# Altium PCB CORE_Prototype_1.PcbDoc
Units mil, origin at the board's own origin, x right, y up, seen from the top; angles counter-clockwise.
Board outline 1405.03 x 1162.59 mil, 2 copper layers (Top Layer, Bottom Layer); 42 components, 43 nets, 240 pads, 109 vias.
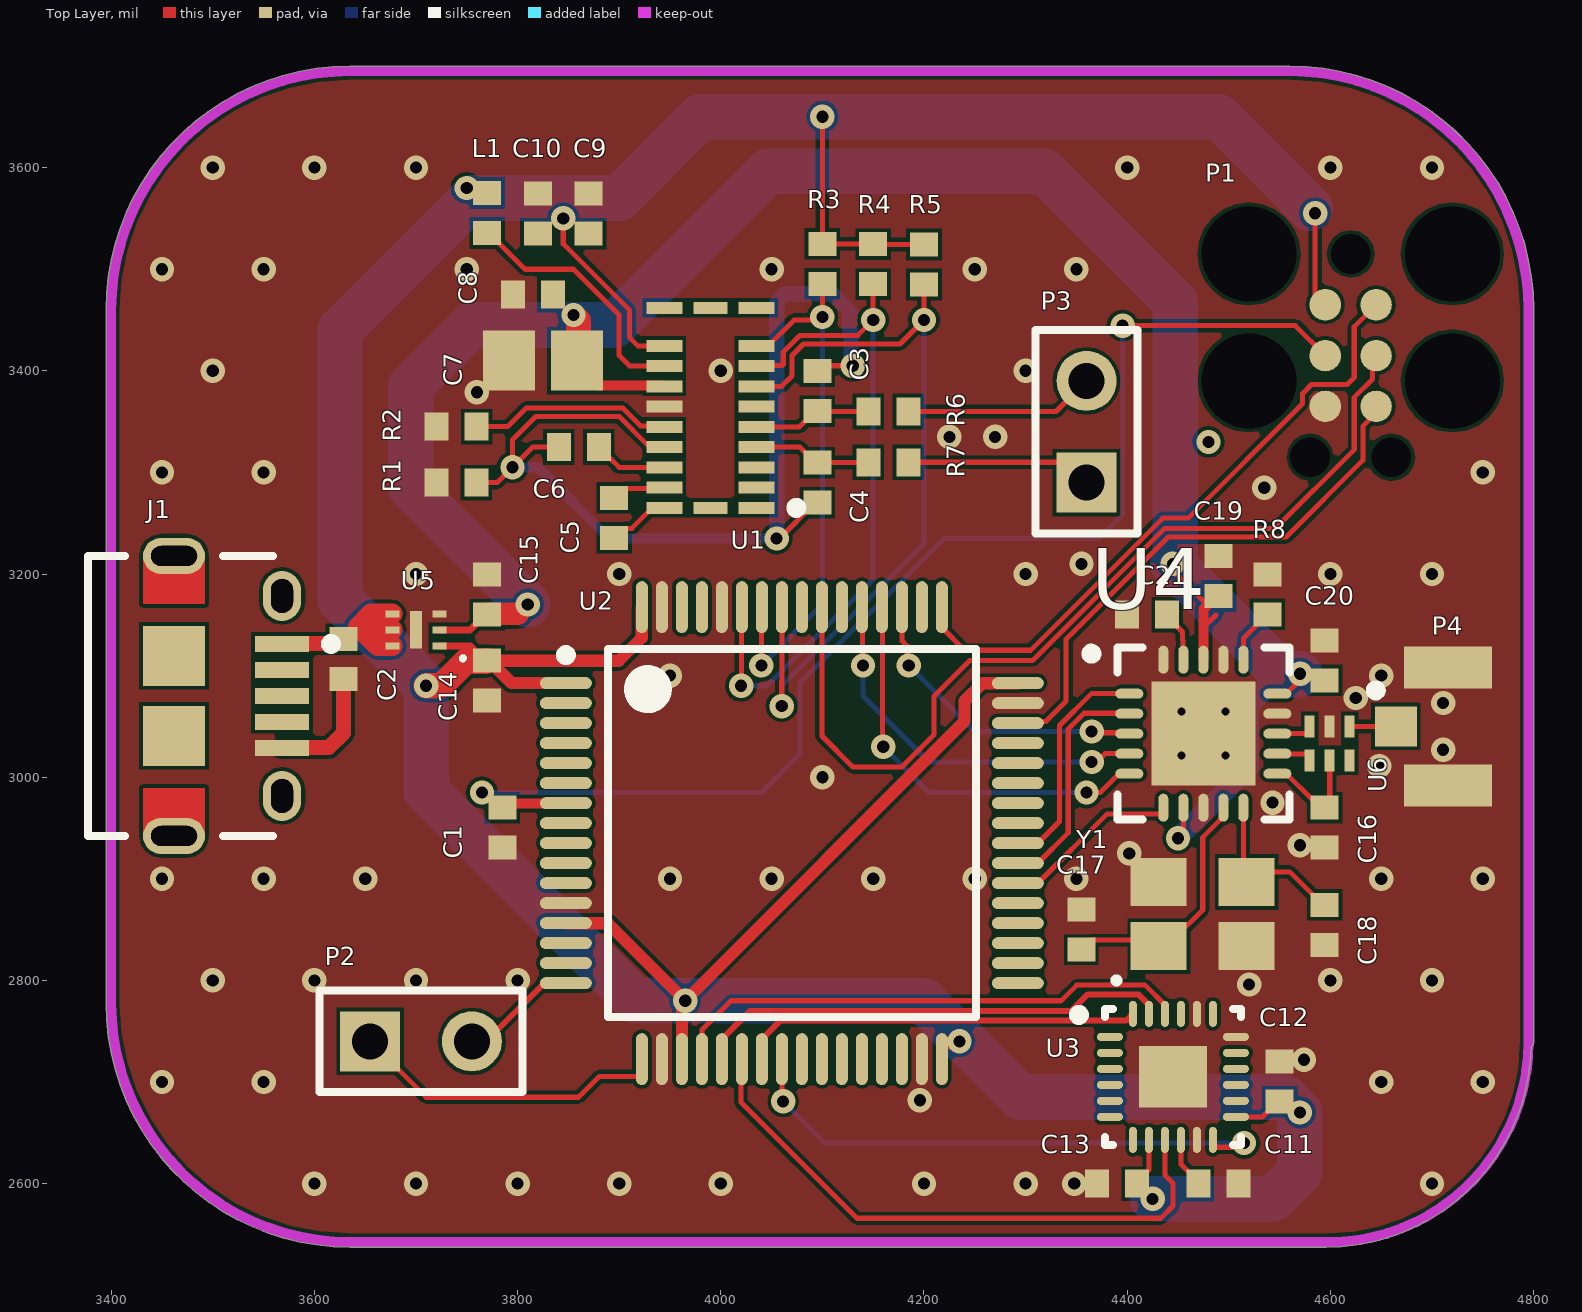
[diagram p0: Top Layer view]
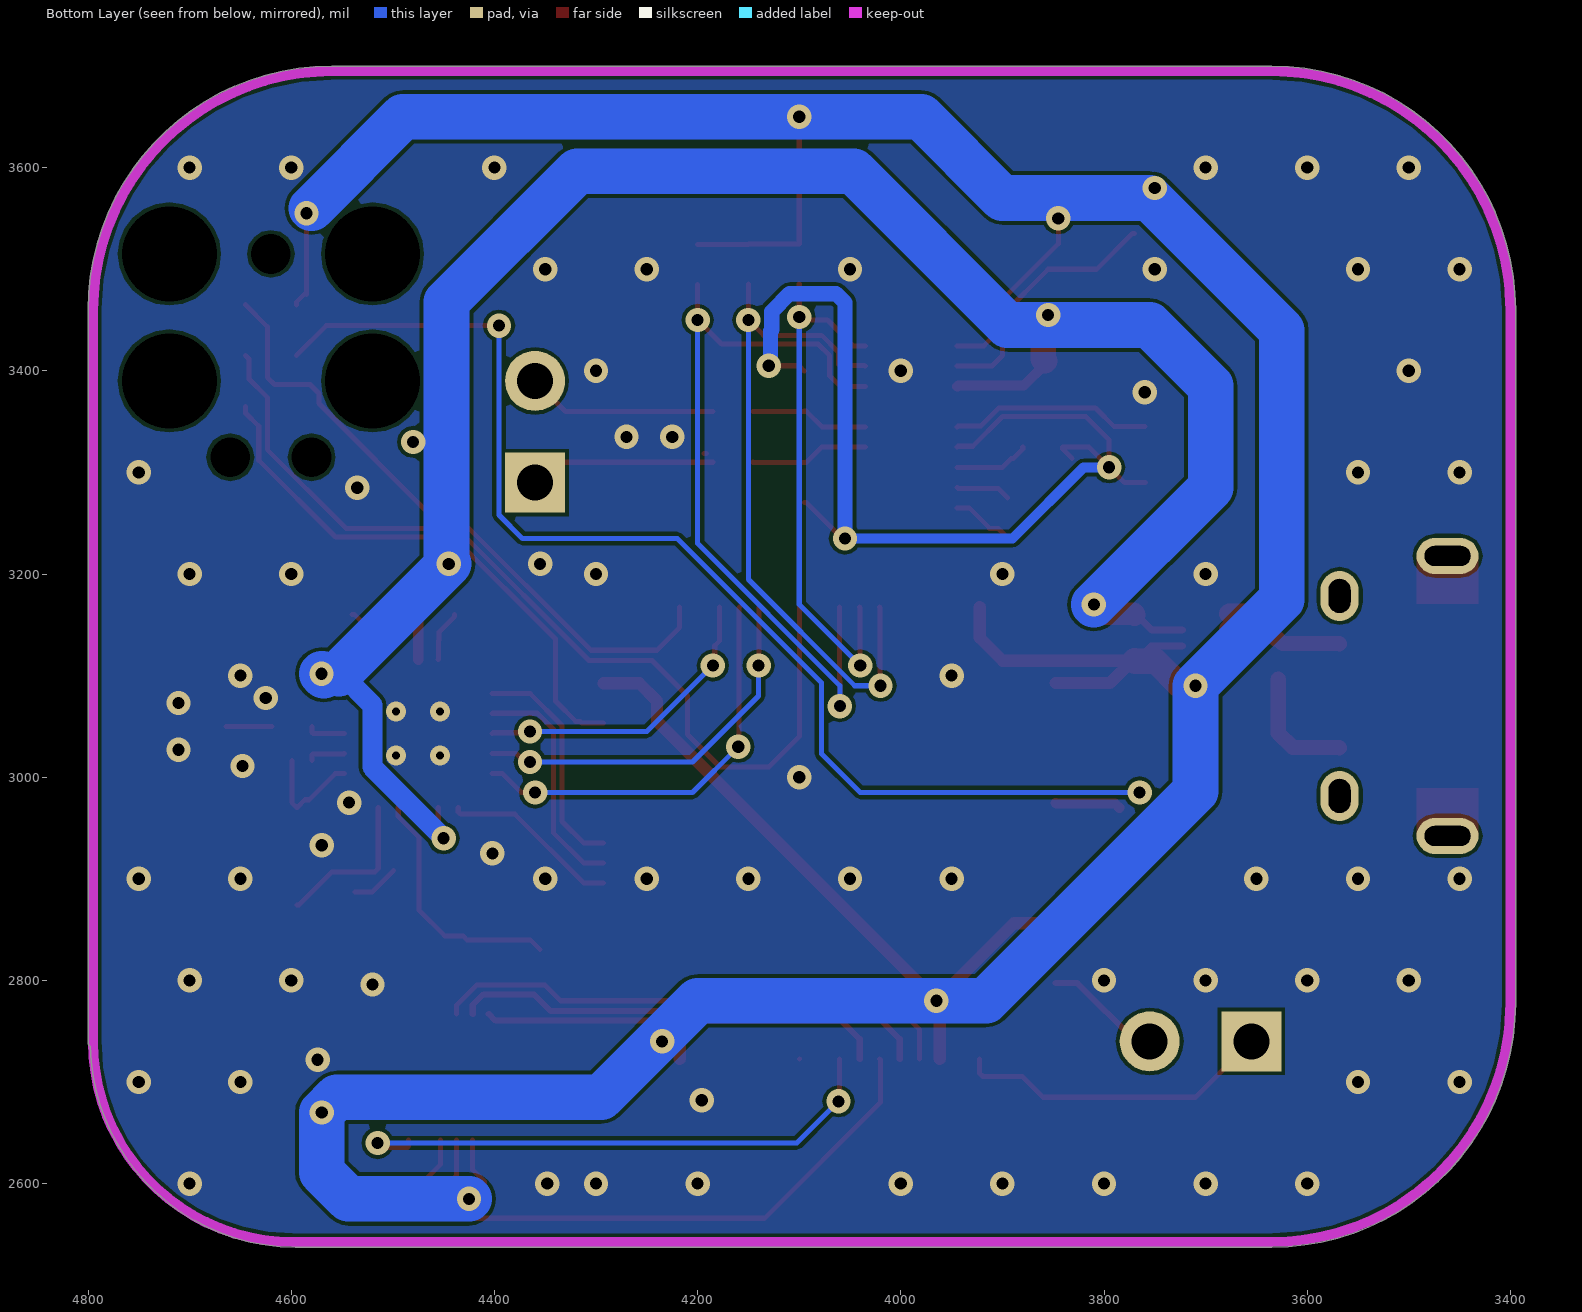
[diagram p1: Bottom Layer view, seen from below]
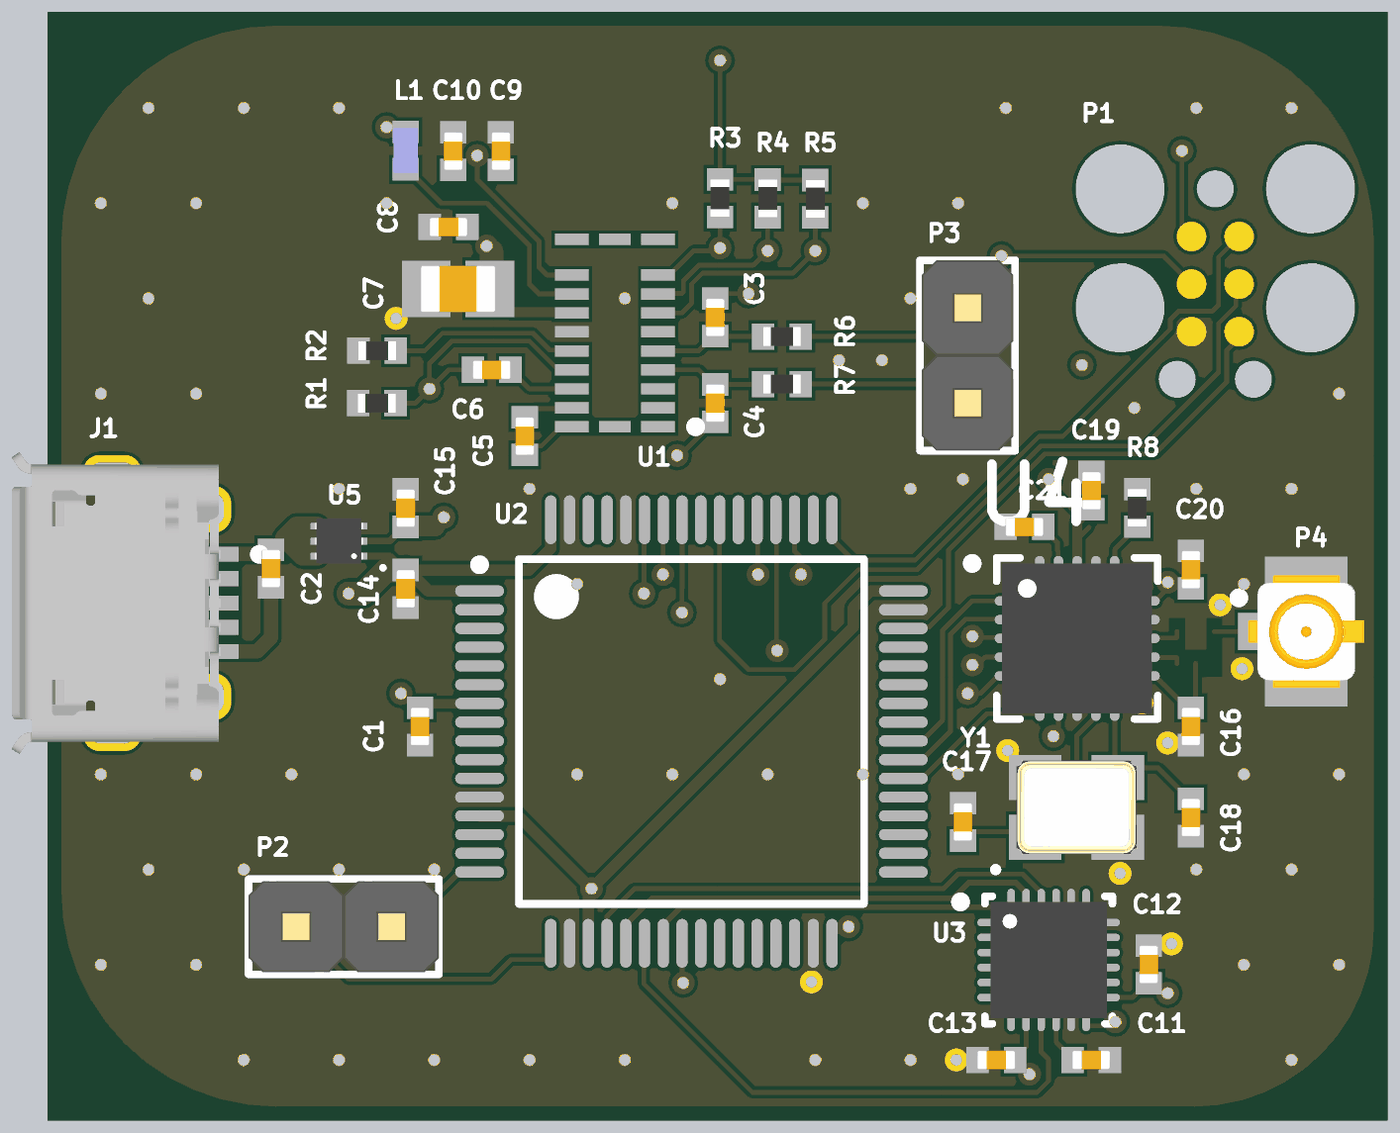
[diagram p2: 3D render of the assembled board from above, using the file's embedded part models]

## Layer stack, top to bottom
Top Solder: solder mask 0.4, Solder Resist, Dk 3.5
Top Layer: signal copper 1.4
Dielectric 1: dielectric 12.6, FR-4, Dk 4.8
Bottom Layer: signal copper 1.4
Bottom Solder: solder mask 0.4, Solder Resist, Dk 3.5

## Board outline
3394.99,2777.5 ccw(c3635.05,2777.5) 3635,2537.43 ccw(c3635,2542.45) 3635,2537.43 4596.01,2537.43 ccw(c4596.01,2739.17) 4797.71,2734.95 ccw(c4795,2739.17) 4798.55,2735.63 ccw(c4795,2739.18) 4800.02,2739.18 4800.02,3459.95 ccw(c4559.95,3459.95) 4560,3700.01 ccw(c4560,3695) 4560,3700.01 3635.25,3700.01 ccw(c3635.05,3695) 3635.05,3700.02 ccw(c3635.05,3459.95) 3394.99,3460 ccw(c3400,3460) 3394.99,3460

## Design rules (kind name [scope] priority, off if disabled: settings)
Clearance [All] p1: gap=3.5 ignorepadtopadclearanceinfootprint=FALSE
PolygonConnect [All] p1: connectstyle=Direct reliefconductorwidth=10 reliefentries=4 polygonreliefangle="90 Angle" airgapwidth=10
RoutingVias [All] p1: holewidth=12 width=24 viastyle="Through Hole" minholewidth=12 minwidth=24 maxholewidth=28 maxwidth=50
SolderMaskExpansion [All] p1: expansion=0
Width [All] p1: maxlimit=250 minlimit=5 preferedwidth=5
30 further rules are at their usual default settings.

## Classes and differential pairs
component class U_RADIO_nRF24L01: C16 C17 C18 C19 C20 C21 P4 R8 U4 U6 Y1
component class U_MAIN_STM32L476RGT6: C1 C2 C14 C15 J1 P1 P2 U2 U5
component class U_HEALTH_MAX86150: C3 C4 C5 C6 C7 C8 C9 C10 L1 P3 R1 R2 R3 R4 R5 R6 R7 U1
component class U_ACC_ICM20948: C11 C12 C13 U3

## Components (designator, comment, footprint, x,y, rotation, side; value= is the part's Value field where it differs from the comment)
C1 "Cap" CAPC1005N 3785,2950.31 r90 top value=0.1uF
C2 "Cap" CAPC1005N 3628.63,3116.15 r90 top value=1uF
C3 "Cap" CAPC1005N 4095,3380 r270 top value=10pF
C4 "Cap" CAPC1005N 4095,3290 r270 top value=10pF
C5 "Cap" CAPC1005N 3895,3255.32 r270 top value=1uF
C6 "Cap" CAPC1005N 3860.31,3325 r0 top value=1uF
C7 "Cap" CAPC2012N 3825,3410 r0 top value=10uF
C8 "Cap" CAPC1005N 3815,3475 r0 top value=0.1uF
C9 "Cap" CAPC1005N 3870,3554.69 r270 top value=2.2uF
C10 "Cap" CAPC1005N 3820,3554.69 r270 top value=0.1uF
C11 "Cap" CAPC1005N 4489.69,2600 r180 top value=0.1uF
C12 "Cap" CAPC1005N 4550,2700.32 r270 top value=0.1uF
C13 "Cap" CAPC1005N 4390,2600 r0 top value=0.1uF
C14 "Cap" CAPC1005N 3770,3095 r90 top value=1uF
C15 "Cap" CAPC1005N 3770,3179.69 r270 top value=1uF
C16 "Cap" CAPC1005N 4594.37,2950.31 r90 top value=2.2nF
C17 "Cap" CAPC1005N 4355,2850 r270 top value=15pF
C18 "Cap" CAPC1005N 4594.37,2854.68 r90 top value=15pF
C19 "Cap" CAPC1005N 4490,3198 r270 top value=10nF
C20 "Cap" CAPC1005N 4594.37,3115 r270 top value=1nF
C21 "Cap" CAPC1005N 4419.68,3160 r0 top value=33nF
J1 "10118194-0001LF" FCI-10118194-0001LF-5_V 3515,3080 r270 top
L1 "Ferrite Bead" INDC1005N 3770,3555.31 r90 top value=0H
P1 "DNI" TC2030 4620,3515 r270 top
P2 "Header 2" HDR1X2-PINS 3655,2740 r0 top
P3 "Header 2" HDR1X2-PINS 4360,3290 r90 top
P4 "BNC" MCB3-V4 4715.55,3050 r270 top
R1 "Res3" RESC1005N 3739.68,3290 r0 top value=0
R2 "Res3" RESC1005N 3740,3345 r0 top value=0
R3 "Res3" RESC1005N 4100,3505.32 r90 top value=50K
R4 "Res3" RESC1005N 4150,3505 r90 top value=50K
R5 "Res3" RESC1005N 4200,3504.68 r90 top value=50K
R6 "Res3" RESC1005N 4165,3360 r180 top value=50K
R7 "Res3" RESC1005N 4165,3310 r180 top value=50K
R8 "Res" RESC1005N 4538.03,3180 r270 top value=22k
U1 "MAX86150EFF+" MAXM-OESIP-22_V 3989.72,3363.56 r180 top
U2 "STM32L476RGT6" STM-LQFP64_N 4070,2945 r0 top
U3 "ICM-20948" TDK-QFN-24_L 4445,2705 r0 top
U4 "NRF24L01P-T" NRSC-QFN-20_L 4475,3042.83 r0 top
U5 "MIC5393-SGYMX-TR" MIC5392 3700,3145 r180 top
U6 "2450BM14A0002T" 2450BM14A0002 5308.03,3158.27 r0 top
Y1 "XTAL_4SMD" XTAL3225-4-N 4474.37,2865 r0 top

## Footprints (in the part's own frame and the unit in brackets; to place one, negate y for a bottom-side part, rotate by r counter-clockwise, add the part's x,y. Pads: shape width x height; smd on the part's side, far side on the other; paste and mask are expansions set on the pad)
2450BM14A0002 [mm]
  rect 0.25x0.55 smd: 1(-17.5,-2.75) 2(-18,-2.75) 3(-18.5,-2.75) 4(-18.5,-3.6) 5(-18,-3.6) 6(-17.5,-3.6)
CAPC1005N [mm] "Chip Capacitor (0402), Body 1.0x0.5mm, IPC Medium Density"
  rect 0.6x0.7 smd: 1(-0.5,0) 2(0.5,0)
  body extent -0.51,-0.26 0.51,0.26, height 0.61
CAPC2012N [mm] "Chip Capacitor (0805), Body 2.0x1.3mm, IPC Medium Density"
  rect 1.3x1.5 smd: 1(-0.85,0) 2(0.85,0)
  body extent -1,-0.63 1,0.63, height 0.85
FCI-10118194-0001LF-5_V [mm] "SMD, 5-Leads, Body 7x5mm, Pitch 0.65 mm"
  rect 0.4x1.35 smd: 1(-1.3,1.35) 2(-0.65,1.35) 3(0,1.35) 4(0.65,1.35) 5(1.3,1.35)
  oval 1.25x0.95 hole 0.55 slot 0.85 at 0 deg: 6(-2.5,1.35) 7(2.5,1.35)
  oval 0.9x1.55 hole 0.5 slot 1.15 at 90 deg: 8(-3.5,-1.35) 9(3.5,-1.35)
  rect 1.5x1.55 smd: 10(-1,-1.35) 11(1,-1.35)
  Top Layer region: -2.3,-2.125 -2.3,-0.575 -3.5,-0.575 -3.5,-2.125
  Top Layer region: 3.5,-2.125 3.5,-0.575 2.3,-0.575 2.3,-2.125
  silkscreen extent -3.5,-3.5 3.5,2.7, body extent -4.02,-4.03 4.02,1.55, height 2.72
HDR1X2-PINS [mm] "Connector; Header; 2 Position"
  rect 1.5x1.5 hole 0.9: 1(0,0)
  round 1.5 hole 0.9: 2(2.54,0)
  silkscreen extent -1.27,-1.27 3.81,1.27, body extent -1.27,-1.22 3.81,1.22, height 10.3
INDC1005N [mm] "Chip Inductor, Body 1.0x0.5mm, IPC Medium Density"
  rect 0.6x0.7 smd: 1(-0.5,0) 2(0.5,0)
  body extent -0.59,-0.32 0.59,0.32, height 0.65
MAXM-OESIP-22_V [mm] "SMD, 22-Leads, Body 3.3x5.6mm"
  rect 0.9x0.3 smd: 1(-1.15,2.5) 2(-1.15,1.994) 3(-1.15,1.488) 4(-1.15,0.981) 5(-1.15,0.475) 6(-1.15,-0.031) 7(-1.15,-0.537) 8(-1.15,-1.044) 9(-1.15,-1.55) 10(-1.15,-2.5) 12(1.15,-2.5) 13(1.15,-1.55) 14(1.15,-1.044) 15(1.15,-0.537) 16(1.15,-0.031) 17(1.15,0.475) 18(1.15,0.981) 19(1.15,1.488) 20(1.15,1.994) 21(1.15,2.5)
  rect 0.85x0.3 smd: 11(0,-2.5) 22(0,2.5)
  silkscreen extent -2.28,2.38 -2.03,2.62, body extent -1.65,-2.8 1.65,2.8, height 1.4
MCB3-V4 [mm] "Connector; RF Coaxial, MCB SM; 4 Position; Vertical, Body 3.1x3.0mm (LxW)"
  rect 1x1.05 smd: 1(0,-1.3)
  rect 1.05x2.2 smd: 2(-1.475,0) 2(1.475,0)
  silkscreen extent -1.02,-1.92 -0.78,-1.67, body extent -1.5,-1.55 1.5,1.55, height 1.25
MIC5392 [mm] "SON, 6-Leads, Body 1.20x1.20mm, Pitch 0.40mm, Thermal Pad 0.94x0.02mm, IPC Medium Density"
  rect 0.35x0.18 smd: 1(-0.585,0.4) 2(-0.585,0) 3(-0.585,-0.4) 4(0.585,-0.4) 5(0.585,0) 6(0.585,0.4)
  rect 0.3x0.94 smd: 7(0,0)
  silkscreen extent -1.22,0.66 -1.12,0.76, body extent -0.64,-0.6 0.64,0.6, height 0.55
NRSC-QFN-20_L [mm] "QFN, 20-Leads, Body 4x4mm, Pitch 0.5mm, Thermal Pad 2.6x2.6mm, IPC High Density"
  oval 0.7x0.25 smd: 1(-1.85,1) 2(-1.85,0.5) 3(-1.85,0) 4(-1.85,-0.5) 5(-1.85,-1) 11(1.85,-1) 12(1.85,-0.5) 13(1.85,0) 14(1.85,0.5) 15(1.85,1)
  oval 0.25x0.7 smd: 6(-1,-1.85) 7(-0.5,-1.85) 8(0,-1.85) 9(0.5,-1.85) 10(1,-1.85) 16(1,1.85) 17(0.5,1.85) 18(0,1.85) 19(-0.5,1.85) 20(-1,1.85)
  rect 2.6x2.6 smd: 21(0,0)
  silkscreen extent -2.92,-2.15 2.15,2.15, body extent -2,-2 2,2, height 0.95
RESC1005N [mm] "Chip Resistor, Body 1.1x0.5mm, IPC Medium Density"
  rect 0.6x0.7 smd: 1(-0.5,0) 2(0.5,0)
  body extent -0.5,-0.25 0.5,0.25, height 0.35
STM-LQFP64_N [mm] "QFP, 64-Leads, Body 10x10mm, Pitch 0.5mm, IPC Medium Density"
  oval 1.3x0.3 smd: 1(-5.65,3.75) 2(-5.65,3.25) 3(-5.65,2.75) 4(-5.65,2.25) 5(-5.65,1.75) 6(-5.65,1.25) 7(-5.65,0.75) 8(-5.65,0.25) 9(-5.65,-0.25) 10(-5.65,-0.75) 11(-5.65,-1.25) 12(-5.65,-1.75) 13(-5.65,-2.25) 14(-5.65,-2.75) 15(-5.65,-3.25) 16(-5.65,-3.75) 33(5.65,-3.75) 34(5.65,-3.25) 35(5.65,-2.75) 36(5.65,-2.25) 37(5.65,-1.75) 38(5.65,-1.25) 39(5.65,-0.75) 40(5.65,-0.25) 41(5.65,0.25) 42(5.65,0.75) 43(5.65,1.25) 44(5.65,1.75) 45(5.65,2.25) 46(5.65,2.75) 47(5.65,3.25) 48(5.65,3.75)
  oval 0.3x1.3 smd: 17(-3.75,-5.65) 18(-3.25,-5.65) 19(-2.75,-5.65) 20(-2.25,-5.65) 21(-1.75,-5.65) 22(-1.25,-5.65) 23(-0.75,-5.65) 24(-0.25,-5.65) 25(0.25,-5.65) 26(0.75,-5.65) 27(1.25,-5.65) 28(1.75,-5.65) 29(2.25,-5.65) 30(2.75,-5.65) 31(3.25,-5.65) 32(3.75,-5.65) 49(3.75,5.65) 50(3.25,5.65) 51(2.75,5.65) 52(2.25,5.65) 53(1.75,5.65) 54(1.25,5.65) 55(0.75,5.65) 56(0.25,5.65) 57(-0.25,5.65) 58(-0.75,5.65) 59(-1.25,5.65) 60(-1.75,5.65) 61(-2.25,5.65) 62(-2.75,5.65) 63(-3.25,5.65) 64(-3.75,5.65)
  silkscreen extent -5.77,-4.6 4.6,4.6, body extent -5,-5 5,5, height 1.6
TC2030 [mil]
  round 31 smd paste-100: 1(50,-25) 2(50,25) 3(100,-25) 4(100,25) 5(150,-25) 6(150,25)
  round 0 hole 93.5 unplated paste+0: MH(0,100) MH(0,-100) MH(125,100) MH(125,-100)
  round 0 hole 39 unplated paste+0: MH(0,0) MH(200,-40) MH(200,40)
TDK-QFN-24_L [mm] "QFN, 24-Leads, Body 3.10x3.10mm, Pitch 0.40mm, Thermal Pad 1.70x1.54mm, IPC High Density"
  oval 0.65x0.2 smd: 1(-1.575,1) 2(-1.575,0.6) 3(-1.575,0.2) 4(-1.575,-0.2) 5(-1.575,-0.6) 6(-1.575,-1) 13(1.575,-1) 14(1.575,-0.6) 15(1.575,-0.2) 16(1.575,0.2) 17(1.575,0.6) 18(1.575,1)
  oval 0.2x0.65 smd: 7(-1,-1.575) 8(-0.6,-1.575) 9(-0.2,-1.575) 10(0.2,-1.575) 11(0.6,-1.575) 12(1,-1.575) 19(1,1.575) 20(0.6,1.575) 21(0.2,1.575) 22(-0.2,1.575) 23(-0.6,1.575) 24(-1,1.575)
  rect 1.7x1.54 smd: 25(0,0)
  silkscreen extent -2.47,-1.7 1.7,1.7, body extent -1.55,-1.55 1.55,1.55, height 1.05
XTAL3225-4-N [mm]
  rect 1.4x1.2 smd: 1(-1.101,-0.791) 2(1.099,-0.791) 3(1.099,0.809) 4(-1.101,0.809)
  silkscreen extent -2.21,-1.7 -2.11,-1.6, body extent -1.61,-1.25 1.61,1.27, height 0.6

## Part data
C1 C2 C3 C4 C5 C6 C7 C8 C9 C10 C11 C12 C13 C14 C15 C16 C17 C18 C19 C20 C21: "Capacitor", LatestRevisionDate=17-Jul-2002, LatestRevisionNote="Re-released for DXP Platform.", PackageDescription="Radial Cap, Thru-Hole; 2 Leads; 0.3 in Pin Spacing", PackageReference=RAD-0.3, Published=8-Jun-2000, Publisher="Altium Limited"
J1: library part CMP-2000-05120-1, "Micro USB B Type Receptacle, 1.8 A, -55 to 85 degC, 5-Pin SMD, RoHS, Tape and Reel", Manufacturer="Amphenol FCI", Package Description="5-Pin Surface Mount Device, Body 8.05 x 5.53 mm, Pitch 0.65 mm", Package Reference=10118194-0001LF-5, Body Orientation=RightAngle, Datasheet URL=https://datasheet.ciiva.com/26945/getdatasheetpartid-418619-26945695.pdf, Datasheet Version="Rev. A, 10/2011", Gender=RCP, Manufacturer URL=http://www.fci.com/, Mounting=SurfaceMount, Number of Contacts=5, Packaging=CutTape, Pitch=0.65mm, Rad Hard=No, Termination Method=Solder, Type=MicroUSBTypeB
L1: library part Inductor, "Inductor", Code_IEC=1005, Code_JEITA=0402, LatestRevisionDate=29-May-2009, LatestRevisionNote="IPC-7351 Footprint Added.", PackageDescription="Chip Inductor", PackageReference=0402-A, Published=8-Jun-2000, Publisher="Altium Limited"
P1: library part TC2030-CTX
P2 P3: "Header, 2-Pin", LatestRevisionDate=17-Jul-2002, LatestRevisionNote="Re-released for DXP Platform.", Publisher="Altium Limited"
P4: "BNC Elbow Connector", LatestRevisionDate=17-Jul-2002, LatestRevisionNote="Re-released for DXP Platform.", Publisher="Altium Limited"
R1 R2 R3 R4 R5 R6 R7: "Resistor", LatestRevisionDate=29-May-2009, LatestRevisionNote="IPC-7351 Footprint Added.", PackageDescription="Chip Resistor", PackageReference=J1-0603, Published=8-Jun-2000, Publisher="Altium Limited"
R8: library part Res1, "Resistor", LatestRevisionDate=17-Jul-2002, LatestRevisionNote="Re-released for DXP Platform.", PackageDescription="Axial Device, Thru-Hole; 2 Leads; 0.3 in Pin Spacing", PackageReference=AXIAL-0.3, Published=8-Jun-2000, Publisher="Altium Limited"
U1: library part CMP-2000-07578-1, "Integrated Photoplethysmogram and Electrocardiogram Bio-Sensor Module for Mobile Health, 1.7 to 2 V, -40 to 85 degC, 22-Pin OESIP, RoHS", Manufacturer=Maxim, Package Description="22-Pin Surface Mount Device, Body 3.3 x 5.6 mm", Package Reference=OESIP-22, Datasheet URL=http://www.mouser.com/ds/2/256/Maxim-6-13-2017-MAX86150%20DS-1114324.pdf, Datasheet Version="Rev. 1, 11/2016", Manufacturer URL=http://www.maximintegrated.com/, Mounting Technology=SurfaceMount
U2: library part CMP-1655-00012-2, "Ultra-Low-Power ARM Cortex-M4 32-bit MCU+FPU, 1024 KB Flash, 128 KB Internal RAM, 51 I/Os, 64-Pin LQFP, -40 to 85 degC, Tray", I/Os (High Current)=51, Manufacturer=STMicroelectronics, Operating Frequency(F) (Processor speed) (MHz)=80, Package Description="64-Pin Low-profile Quad Flat Package, Body 10 x 10 mm, Pitch 0.5 mm", Package Reference=LQFP64, Supply Voltage(Vcc) min (V)=1.71, ComponentLink1Description="Manufacturer URL", ComponentLink1URL=http://www.st.com/, ComponentLink2Description=Datasheet, ComponentLink2URL=http://www.st.com/st-web-ui/static/active/en/resource/technical/document/datasheet/DM00108832.pdf, Core="ARM Cortex-M4", D/A Converter=2, DatasheetVersion="Rev. 4", FLASH Size (Prog) (kB)=1024, Internal RAM Size (kB)=128, Mounting Technology="Surface Mount", Packing=Tray, PartNumber=STM32L476RGT6
U3: library part CMP-2000-07532-1, "World’s Lowest Power 9-Axis MEMS MotionTracking(TM) Device, 1.71 to 3.6 V, -40 to 85 degC, 24-Pin QFN, RoHS, Tape and Reel", Manufacturer=TDK, Package Description="24-Pin Quad Flat No-lead Package, Body 3 x 3 mm, Pitch 0.4 mm", Package Reference=QFN-24, Datasheet URL=https://www.invensense.com/wp-content/uploads/2016/06/DS-000189-ICM-20948-v1.3.pdf, Datasheet Version="Rev. 1.3, 06/2017", Manufacturer URL=http://www.tdk.com/, Mounting Technology=SurfaceMount
U4: library part CMP-2000-06859-1, "Single Chip Transceiver, 2.4 GHz, 60 mW, 1.9 to 3.6 V, -40 to 85 degC, 20-Pin QFN, RoHS, Tray", Current - Receiving=12.6mA~13.5mA, Current - Transmitting=7mA~11.3mA, Frequency=2.4GHz, Manufacturer="Nordic Semiconductor", Operating Temperature=-40°C~85°C, Package / Case=20-VFQFNExposedPad, Package Description="20-Pin Quad Flat No-lead Package, Body 4 x 4 mm, Pitch 0.5 mm", Package Reference=QFN20, Power - Output=0dBm, Standard Package=490, Voltage - Supply=1.9V~3.6V, Category=RF/IFandRFID, Data Rate (Max)=2Mbps, Datasheet URL=http://www.nordicsemi.com/eng/content/download/2726/34069/file/nRF24L01P_Product_Specification_1_0.pdf, Datasheet Version="Rev. 1.0, 09/2008", Design Resources=DevelopmentToolSelector, Family=RFTransceiverICs, For Use With=1490-1002-ND-KITEVALUATIONNRF24L01P1568-1295-ND-SPARKFUNTRANSCEIVERBREAKOUT-1568-1296-ND-SPARKFUNTRANSCEIVERBREAKOUT-1471-1410-ND-DEVBOARDNRFSCLICKNRF24L01P-MODULE-PCB-ND-KITEVALNRF24L01+PCBANTENNANRF24L01P-MODULE-SMA-ND-KITEVALNRF24L01+SMACONNNRF24L01P-UPGRADE-ND-UPGRADE2PCB/1SMANRF24L01103990038-ND-DEVDUINOSENSORNODEV1.3103990053-ND-DEVDUINOSENSORNODEV2(ATMEGA103990074-ND-DEVDUINOSENSORNODE106990026-ND-ENERGYMONITORSHIELDV2113990088-ND-WIRELESSGATESHIELD113990095-ND-DEVDUINOSENSORNODEV3(ATMEGA106030001-ND-ENERGYMONITORSHIELD1597-1361-ND-DEVDUINOSENSORNODEV2.2(ATMEG105990030-ND-RGBWSTRIPWIRELESSSHIELDV1.0, GPIO=-, Manufacturer URL=http://www.nordicsemi.com/eng/Products/, Memory Size=-, Modulation=GFSK, Mounting Technology=SurfaceMount, Online Catalog=nRF24L01+, Other Names=1490-1019, Packaging=Tray, Protocol=-, RF Family/Standard=GeneralISM>1GHZ, Sensitivity=-94dBm, Serial Interfaces=SPI, Series=-, Type=TxRxOnly
U5: "IC REG LINEAR 1.8V/3.3V 6XTDFN", Dropout Voltage=155mV, Manufacturer 1=Microchip, Max Operating Temperature=125°C, Min Current Limit=200mA, Min Operating Temperature=-40°C, Output Current=150mA, Output Voltage=1.8V, Supplier Part Number 1=1611-MIC5393-SGYMX-CT-ND, ComponentLink1Description=http://www.microchip.com/mymicrochip/filehandler.aspx?ddocname=en580190&src-supplier=Digi-Key, ComponentLink1URL=http://www.microchip.com/mymicrochip/filehandler.aspx?ddocname=en580190&src-supplier=Digi-Key, Manufacturer Part Number 1=MIC5393-SGYMX-TR, Mount="Surface Mount", Number of Regulators=2, Packaging="Tape and Reel", Pricing 1="1=0.13000, 25=0.10520, 100=0.10000 (USD)", RoHS=Yes, Stock 1=4457, Supplier 1=Digi-Key
U6: "JOHANSON TECHNOLOGY - 2450BM14A0002T - BALUN, 2.45GHZ, IMPEDANCE MATCHED", Case/Package=0603, Case Code (Metric)=1608, Frequency=2.45GHz, Manufacturer 1=Johanson, Max Frequency=2.5GHz, Max Operating Temperature=85°C, Min Operating Temperature=-40°C, Package Quantity=4000, Supplier Part Number 1=712-1574-1-ND, Case Code (Imperial)=0603, ComponentLink1Description=https://datasheet.ciiva.com/7662/1644648-7662569.pdf?src-supplier=Element14, ComponentLink1URL=https://datasheet.ciiva.com/7662/1644648-7662569.pdf?src-supplier=Element14, ComponentLink2Description=https://datasheet.ciiva.com/29655/balun-filter-matched-2450bm14a0002-v2-29655610.pdf?src-supplier=Digi-Key, ComponentLink2URL=https://datasheet.ciiva.com/29655/balun-filter-matched-2450bm14a0002-v2-29655610.pdf?src-supplier=Digi-Key, ComponentLink3Description=https://datasheet.ciiva.com/24023/2450bm14a0002t-247800-24023183.pdf?src-supplier=Mouser, ComponentLink3URL=https://datasheet.ciiva.com/24023/2450bm14a0002t-247800-24023183.pdf?src-supplier=Mouser, Contact Plating=Tin,Matte, Impedance=50R, Insertion Loss=2dB, Manufacturer Part Number 1=2450BM14A0002T, Mount="Surface Mount", Number of Pins=6, Packaging="Tape and Reel", Pricing 1="1=0.94000, 10=0.83000, 25=0.74960, 100=0.65600, 250=0.57568, 500=0.50872, 1000=0.40163 (USD)", REACH SVHC=Unknown, Return Loss=9.5dB, RoHS=Yes, Stock 1=68815, Supplier 1=Digi-Key, Termination=SMD/SMT
Y1: "Crystal Oscillator (4 pin)", LatestRevisionDate=17-Jul-2002, LatestRevisionNote="Re-released for DXP Platform.", PackageDescription="Crystal, Thru-Hole; 2 Leads; Body 3.1 x 8.2 mm (Dia.xH)", PackageReference=R38, Published=8-Jun-2000, Publisher="Altium Limited"

## Via types
v1: diameter 24, hole 12, Top Layer to Bottom Layer, tented both sides, 93 vias
v2: diameter 24, hole 12, Top Layer to Bottom Layer, 12 vias
v3: diameter 19.68, hole 7.87, Top Layer to Bottom Layer, 4 vias

## Nets (pads, with @x,y where several pads share a name; then routed paths per layer and width w, separated by ;. In a path a pad name is that pad's centre, name@x,y a point inside that pad or via, vN(x,y) a via of type N, cw(c..) or ccw(c..) an arc to the next point about the centre after c; other vN are vias at no path point)
1V8A: L1.1 U1.14 | length 252
  Top Layer w5: L1.1@3770,3535.32 3771.97,3535.32 3807.28,3500 3855,3500 3900,3455 3900,3415 3910.34,3404.66 U1.14
1V8D: C9.2 C10.2 C12.2 C13.2 C14.2 L1.2 P1.1 R3.2 R4.2 R5.2 U1.13 U2.1 U2.13 U2.19 U2.32 U2.48 U2.64 U3.8 U3.13 U5.1 | length 4484.6
  Top Layer w5: v1(3845,3550) 3845,3525 3910,3460 3910,3432.93 3918.34,3424.59 U1.13 ; v1(4100,3650) R3.2 4149.69,3525 R4.2 4150.31,3524.37 R5.2 ; C13.2 4409.69,2601.97 4421.38,2613.66 U3.8 ; U3.13 4533.03,2665.63 4548.03,2680.63 C12.2 ; v1(4585,3555) 4585,3475 4586.26,3476.26 4595,3467.53 P1.1
  Top Layer w7: U5.1 3753.46,3129.25 3768.03,3114.69 C14.2
  Top Layer w12: C14.2 C14.2@3771.97,3114.69 ; U2.13 3847.65,2856.32 3888.68,2856.32 v1(3965,2780) ; U2.1 3794.02,3092.64 C14.2@3771.97,3114.69 ; U2.64 3922.27,3167.35 3922.27,3137.27 3899.69,3114.69 C14.2@3771.97,3114.69 ; U2.19 3961.73,2773.49 3965,2776.75 v1(3965,2780) ; U2.32 4217.64,2738.03 4217.73,2738.12 4233.12,2738.12 v1(4235,2740) ; U2.48 4292.35,3092.54 4257.54,3092.54 4240,3075 4240,3055 v1(3965,2780)
  Top Layer w25: v1(3710,3090) 3725,3090 3749,3114 3769.31,3114 C14.2
  Bottom Layer w45: v1(4425,2585) 4543.64,2585 4570,2611.36 v1(4570,2670) 4555,2685 4295,2685 4200,2780 v1(3965,2780) 3916.26,2780 3710,2986.26 v1(3710,3090) 3625,3175 3625,3440 3755,3570 3900,3570 3980,3650 v1(4100,3650) 4490,3650 v1@4580,3560
  other v1: 3750,3580
3V3: C7.2 C8.2 C15.2 C19.2 C20.2 U1.15 U4.7 U4.15 U4.18 U5.2 | length 2237
  Top Layer w5: v1@4448.64,3199.71 C19.2@4479.03,3169.31 ; v1(4450,2940) 4450,2943.41 4455.31,2948.72 U4.7 ; U4.18 4475,3147.28 4487.36,3159.64 ; U4.15 4556.69,3082.2 v1@4569.8,3095.31
  Top Layer w7: U5.2 3753.03,3145 3768.03,3160 C15.2
  Top Layer w10: C7.2 3858.46,3406.06 3879.06,3385.47 3943.7,3385.47 U1.15 ; U4.18 4475,3165.28 4479.03,3169.31 4488.03,3178.31 C19.2
  Top Layer w22: C15.2 3770.81,3160.81 3800.27,3160.81
  Top Layer w25: C7.2 3860,3411.54 v1@3860,3449.09
  Bottom Layer w20: v1(4450,2940) 4520,3010 4520,3071 4550.81,3101.81 4553.19,3101.81 4569.81,3101.81 v1(4570.19,3101.81)
  Bottom Layer w45: v1(3810,3170) 3695,3285 3695,3385 3755,3445 3895,3445 4046.5,3596.5 4318.5,3596.5 4447.25,3467.75 4447.25,3212.25 v1(4445,3210) 4553.19,3101.81 ; v1@4568,3100 v1@4569.81,3101.81
  other v1: 4480,3330 3855,3455
AGND: C3.1 C4.2 C6.1 R1.2 U1.18 | length 1059.9
  Top Layer w5: R1.2 3780,3290 v1(3795,3305) ; C6.1@3831.32,3313.72 3840.63,3323.03 C6.1 3815,3325 v1(3795,3305) ; U1.18 3943.61,3325.77 3929.23,3325.77 3900,3355 3817.93,3355 3795,3332.07 v1(3795,3305) ; v1(4055,3235) 4057.72,3235 4093.03,3270.31 C4.2 ; C3.1 4100.32,3405 v1(4130,3405)
  Bottom Layer w10: v1(3795,3305) 3820,3305 3890,3235 v1(4055,3235)
  Bottom Layer w15: v1(4055,3235) 4055,3467.14 4063.79,3475.93 4109.53,3475.93 4127,3458.46 4127,3440.47 4128.28,3439.2 4128.28,3406.72 v1(4130,3405)
ANT1_5: U4.12 U6.4 | length 37.7
  Top Layer w5: U4.12 4548.19,3022.8 4578.76,3022.8 4579.68,3021.88 U6.4
ANT2_5: U4.13 U6.3 | length 38.3
  Top Layer w5: U4.13 4548.19,3043.19 4578.76,3043.19 4579.68,3044.11 U6.3
C1_3_N: C5.1 U1.20 | length 53.6
  Top Layer w5: C5.1 3904.31,3284.31 3943.69,3284.31 U1.20
C1_3_P: C5.2 U1.21 | length 61.7
  Top Layer w5: C5.2 3904.31,3244.94 3912.44,3244.94 3932.64,3265.14 U1.21
CE: U2.40 U4.1 | length 226
  Top Layer w5: U2.40 4312.13,2935.16 4333.5,2956.53 4333.5,3050.98 4364.73,3082.2 U4.1
DGND: R2.2 U1.17 | length 200.1
  Top Layer w5: R2.2 3790,3345 3808.5,3363.5 3903.52,3363.5 3921.25,3345.77 3943.54,3345.77 U1.17
DVDD_5: C21.2 U4.19 | length 50.9
  Top Layer w5: C21.2 4439.37,3158.03 4454.37,3143.03 4454.37,3135 4454.96,3134.41 4454.96,3116.02 U4.19
ECG_3_N: C4.1 R7.2 U1.4 | length 116.8
  Top Layer w5: U1.4 4077.79,3324.93 4093.03,3309.68 C4.1 4145,3309.68 R7.2
ECG_3_P: C3.2 R6.2 U1.5 | length 118.8
  Top Layer w5: U1.5 4077.58,3344.86 C3.2@4093.03,3360.31 ; C3.2 C3.2@4093.03,3360.31 ; R6.2 4093.35,3360 C3.2@4093.03,3360.31
ECG_N_IN_3: P3.1 R7.1 | length 185.6
  Top Layer w5: R7.1 4340,3310 P3.1 ; R7.1@4191.5,3318.78 R7.1@4193.46,3318.78
ECG_P_IN_3: P3.2 R6.1 | length 187.7
  Top Layer w5: R6.1 4330,3360 P3.2
GND: C1.1 C2.1 C7.1 C8.1 C9.1 C10.1 C11.1 C12.1 C13.1 C14.1 C15.1 C16.1 C17.1 C18.1 C19.1 C20.1 C21.1 J1.5 P1.5 P4.2 R1.1 R2.1 R8.1 U1.16 U2.12 U2.18 U2.31 U2.47 U2.60 U2.63 U3.11 U3.18 U3.20 U3.25 U4.8 U4.14 U4.17 U4.20 U4.21 U5.3 U5.7 U6.2 Y1.2 Y1.4 | length 119.5
  Top Layer w15: J1.5 3568.52,3029.19 3614.19,3029.19 3628.63,3043.63 C2.1
  other v1: 3600,2600 3700,2600 3800,2600 3900,2600 4000,2600 4200,2600 4300,2600 4700,2600 3450,2700 3550,2700 4650,2700 4750,2700 3500,2800 3600,2800 3700,2800 3800,2800 4600,2800 4700,2800 3450,2900 3550,2900 3650,2900 3950,2900 4050,2900 4150,2900 4250,2900 4350,2900 4650,2900 4750,2900 4100,3000 3950,3100 4650,3100 3700,3200 3900,3200 4300,3200 4600,3200 4700,3200 4355,3210 4355,3210 4535,3285 3450,3300 3550,3300 4750,3300 4225,3335 4270,3335 3500,3400 4000,3400 4300,3400 3450,3500 3550,3500 3750,3500 4050,3500 4250,3500 4350,3500 3500,3600 3600,3600 3700,3600 4400,3600 4600,3600 4700,3600
  other v2: 4348,2600 4196,2682 4574,2722 4520,2796 4402,2925 4570,2933 4543,2975 4648,3011 4711,3027 4711,3073 4625,3078 3760,3379
  other v3: 4453.35,3021.18 4496.65,3021.18 4453.35,3064.49 4496.65,3064.49
ICM_INT: U2.24 U3.12 | length 551.5
  Top Layer w5: U2.24 4060.16,2689.47 4061.36,2688.26 v1(4061.36,2680.95) ; U3.12 4484.37,2637.14 4485.7,2635.82 4510.82,2635.82 v1(4515,2640)
  Bottom Layer w5: v1(4061.36,2680.95) 4102.31,2640 v1(4515,2640)
INTB: R5.1 U1.7 U2.57 | length 774.2
  Top Layer w5: U1.7 4059.72,3384.72 4070,3395 4070,3415 4081.43,3426.43 4176.43,3426.43 v1(4200,3450) R5.1 ; v1(4060,3070) 4060,3094.54 4060.16,3094.7 U2.57
  Bottom Layer w5: v1(4060,3070) 4060,3090 4200,3230 v1(4200,3450)
IREF_5: R8.2 U4.16 | length 56.4
  Top Layer w5: U4.16 4514.67,3115.96 4514.67,3136.95 R8.2 R8.2@4540,3160.32
IRQ: U2.38 U4.6 | length 176.3
  Top Layer w5: U2.38 4312.13,2895.79 4379.98,2963.64 4433.39,2963.64 4435.63,2965.88 U4.6
REGOUT_2: C11.2 U3.10 | length 50.1
  Top Layer w5: U3.10 4452.87,2619.09 4470,2601.97 C11.2
RESET_4: C1.2 P1.3 U2.7 | length 1247.2
  Top Layer w5: v1(4395.53,3444.47) 4565.53,3444.47 P1.3
  Top Layer w10: C1.2 3789.18,2974.18 3847.21,2974.18 U2.7
  Bottom Layer w5: v1(3765,2985) 4040,2985 4078,3023 4078,3093 4220,3235 4372.54,3235 4395.53,3257.99 v1(4395.53,3444.47)
RF_UNBAL_5: P4.1 U6.1 | length 45.3
  Top Layer w5: U6.1 P4.1
SCL: R3.1 U1.9 U2.58 | length 534.9
  Top Layer w5: U1.9 4046.81,3424.59 4072.22,3450 4097.07,3450 v1(4100,3452.93) R3.1 ; v1(4040,3110) 4040.24,3110.24 4040.24,3167.2 U2.58
  Bottom Layer w5: v1(4040,3110) 4100,3170 v1(4100,3452.93)
SDA: R4.1 U1.8 U2.59 | length 682.7
  Top Layer w5: v1(4020,3090) 4020.39,3090.39 4020.39,3167.05 U2.59 ; U1.8 4035.56,3405.22 4060.22,3405.22 4061.5,3406.5 4061.5,3418.52 4077.91,3434.93 4134.93,3434.93 v1(4150,3450) R4.1
  Bottom Layer w5: v1(4020,3090) 4045.46,3090 4150,3194.54 v1(4150,3450)
SPI1.CLK: U2.21 U3.23 | length 471.4
  Top Layer w6: U2.21 4001.1,2742.24 4028.86,2770 4345,2770 4361.3,2786.3 4410.94,2786.3 4421.38,2775.87 U3.23
SPI1.CS: U2.20 U3.22 | length 519.7
  Top Layer w5: U2.20 3981.42,2751.42 4010,2780 4335,2780 4350.3,2795.3 4417.69,2795.3 4437.13,2775.87 U3.22
SPI1.MISO: U2.22 U3.9 | length 588.4
  Top Layer w5: U2.22 4020,2721.77 4020,2680 4134.05,2565.95 4433.02,2565.95 4445,2577.93 4445,2600.24 4437.13,2608.12 U3.9
SPI1.MOSI: U2.23 U3.24 | length 395.1
  Top Layer w6: U2.23 4040.47,2742.24 4058.73,2760.5 4399.12,2760.5 U3.24
SPI2.CLK: U2.51 U4.3 | length 305.2
  Top Layer w5: U2.51 4178.27,3134.35 4183.12,3129.5 4183.12,3111.88 v1(4185,3110) ; v1(4365,3045) 4366.24,3043.76 4401.24,3043.76 U4.3
  Bottom Layer w5: v1(4185,3110) 4250,3045 v1(4365,3045)
SPI2.CS: U2.39 U4.2 | length 230.8
  Top Layer w5: U2.39 4312.13,2915.47 4342,2945.35 4342,3047.46 4357.54,3063 4401.69,3063 U4.2
SPI2.MISO: U2.52 U4.5 | length 406.5
  Top Layer w5: U2.52 4159.29,3166.73 4159.29,3030.71 v1(4160,3030) ; v1(4360,2985) 4373.53,2985 4392,3003.46 U4.5
  Bottom Layer w5: v1(4160,3030) 4205,2985 v1(4360,2985)
SPI2.MOSI: U2.53 U4.4 | length 380.4
  Top Layer w5: U2.53 4139.45,3166.89 4139.45,3110.55 v1(4140,3110) ; v1(4365,3015) 4370.14,3015 4378.29,3023.15 U4.4
  Bottom Layer w5: v1(4140,3110) 4140,3080 4205,3015 v1(4365,3015)
SWCLK_4: P1.2 U2.49 | length 632.7
  Top Layer w5: U2.49 4217.64,3147.36 4240,3125 4305,3125 4435,3255 4460,3255 4572.75,3367.75 4572.75,3377.75 4581.5,3386.5 4616.5,3386.5 4623.5,3393.5 4623.5,3443.5 P1.2
SWO_4: P1.6 U2.46 | length 540.8
  Top Layer w5: U2.46 4313.97,3053.27 4315.7,3055 4320,3055 4340,3075 4340,3135.96 4440.54,3236.5 4549.58,3236.5 4556.5,3236.5 4632,3312 4632,3345.47 4645,3358.47 P1.6
TRACESWO_4: P1.4 U2.55 | length 916.7
  Top Layer w5: U2.55 4099.53,3040.47 4130,3010 4178.03,3010 4210,3041.97 4210,3080 4245,3115 4307.02,3115 4437.02,3245 4546.06,3245 4623.5,3322.44 4623.5,3373.91 4641.59,3392 4641.59,3411.59 P1.4
UART_RX_4: P2.1 U2.17 | length 313.9
  Top Layer w5: P2.1 3710,2685 3860,2685 3880.37,2705.37 3919.22,2705.37 3922.36,2708.52 U2.17
UART_TX_4: P2.2 U2.16 | length 116.3
  Top Layer w6: P2.2 3768.94,2740 3826.3,2797.36 U2.16
V_REF_3: C6.2 U1.19 | length 73.9
  Top Layer w5: C6.2 3880,3323.03 3889.31,3313.72 3891.28,3313.72 3900,3305 U1.19
VDD_PA_5: C16.2 U4.11 U6.5 | length 109
  Top Layer w5: U4.11 4556.69,3003.46 4582.35,2977.81 4586.56,2977.81 C16.2 4599.37,2975 U6.5
VUSB_4: C2.2 J1.1 U5.4 U5.5 U5.6 | length 193.5
  Top Layer w15: J1.1 3568.52,3131.56 3624.35,3131.56 C2.2 3630.6,3135.83 3643.06,3148.29 3646.35,3145
  Top Layer w20: 3643.06,3148.29 3655.51,3160.75 U5.4 ; U5.6 3662.09,3129.25 3646.35,3145 U5.5
XC1_5: C18.2 U4.10 Y1.3 | length 201.3
  Top Layer w5: Y1.3@4499.37,2907.99 4520.49,2886.87 Y1.3@4537.24,2886.87 ; U4.10 4514.37,2910.12 4517.63,2906.86 4559.91,2906.86 4592.4,2874.37 C18.2
XC2_5: C17.2 U4.9 Y1.1 | length 244.6
  Top Layer w5: C17.2 4364.31,2839.63 4426.78,2839.63 4431.02,2843.87 4448.87,2843.87 4474.37,2869.37 4474.37,2940.83 4494.69,2961.14 U4.9
pads on no net: J1.2 J1.3 J1.4 J1.6 J1.7 J1.8 J1.9 J1.10 J1.11 P1.MH U1.1 U1.2 U1.3 U1.6 U1.10 U1.11 U1.12 U1.22 U2.2 U2.3 U2.4 U2.5 U2.6 U2.8 U2.9 U2.10 U2.11 U2.14 U2.15 U2.25 U2.26 U2.27 U2.28 U2.29 U2.30 U2.33 U2.34 U2.35 U2.36 U2.37 U2.41 U2.42 U2.43 U2.44 U2.45 U2.50 U2.54 U2.56 U2.61 U2.62 U3.1 U3.2 U3.3 U3.4 U3.5 U3.6 U3.7 U3.14 U3.15 U3.16 U3.17 U3.19 U3.21 U6.6
copper on no net: | length 0.3
  Top Layer w5: 4099.53,2722.56 4099.76,2722.8

## Polygon pours and split planes (outlines as drawn)
GND on Top Layer "Top Layer-No Net" (solid, remove dead copper, pour order 28): 3387.16,3705 4800,3705 4805,3700 4795,3690 4795,2537.43 3397.01,2537.43
GND on Top Layer "Top Layer-GND 1" (solid, pour order 18): 2665,3625
GND on Bottom Layer "Bottom Layer-No Net" (solid, remove dead copper, pour order 30): 3387.19,3701.45 3388.64,3700 4805,3700 4805,2547.43 4795,2537.43 4792.43,2540 3395,2540
GND on Bottom Layer "Bottom Layer-GND 1" (solid, pour order 10): 3085,3995

## Keep-outs
Keep-Out Layer:
  region: 5385,3405
  region: 5425,3500
  lines w10: 3400,2777.5 ccw(c3635.05,2777.5) 3635,2542.45 4596.01,2542.45 4598.27,2542.45 ccw(c4598.27,2739.17) 4795,2739.17 4795,2739.18 4795,3420 4795,3459.95 ccw(c4559.95,3459.95) 4560,3695 3635.05,3695 ccw(c3635.05,3459.95) 3400,3460 3400,2777.5

## Other copper
Top Layer:
  region net 1V8D: 4200,3510

## Text inside footprints (layer, text, board x,y; h text height)
J1: Mechanical 6 "PCB EDGE" at 3400.83,3363.46 h18 r270